# EAGLE board Tubes Kelompok 8 (EAGLE 9.7.0)

Size 181.02 x 149.39 mm. Coordinates in mm from the lower left corner, seen from the top.
Outline: 0,0 181.02,0 181.02,149.39 0,149.39 0,0
Copper layers (1*16): Top 0.035mm / dielectric 1.5mm / Bottom 0.035mm
Design rules "default": minimum track width 6mil, minimum drill 0.35mm, track to track 6mil, track to pad 6mil, pad to pad 6mil, via to via 6mil, smd to smd 6mil, copper to edge 40mil, drill to drill 6mil, minimum pad ring 10mil, minimum via ring 8mil, stop-mask expansion 4mil, vias tented up to drill 0mil, thermal gap 10mil

## Footprints (pad centres in the part's own frame; a part is rotated, then mirrored left to right if it is on the bottom)
LED-RGB-5MM = drill 0.9: B 0.635,0.635; C -0.635,-0.635; G 1.905,-0.635; R -1.905,0.635
MQ-XX-SOCKET = drill 1.27: 1 -6.223,6.223; 2 -8.788,0; 3 -6.223,-6.223; 4 6.223,-6.223; 5 8.788,0; 6 6.223,6.223
MOTOR = drill 1.118 pad 3.15 octagon: + 2.54,0; - -2.54,0
PIEZO = drill 1 pad 1.6: 1 -3.5,0; 2 3.5,0
RESAD1016W63L850D250B = drill 0.83 pad 1.43: 1 -5.08,0; 2 5.08,0
SWITCH-MOMENTARY-PTH-6.5MM = drill 1.016 pad 1.88: 1 -3.251,2.261; 2 3.251,2.261; 3 -3.251,-2.261; 4 3.251,-2.261
ARDUINO-UNO-R3-SHIELD = drill 1.016 pad 1.88: 3.3V 24.13,-2.54; 5V 24.13,0; A0 24.13,12.7; A1 24.13,15.24; A2 24.13,17.78; A3 24.13,20.32; A4 24.13,22.86; A5 24.13,25.4; AREF -24.13,-13.97; D2 -24.13,20.32; D3 -24.13,17.78; D4 -24.13,15.24; D5 -24.13,12.7; D6 -24.13,10.16; D7 -24.13,7.62; D8 -24.13,3.81; D9 -24.13,1.27; D10 -24.13,-1.27; D11 -24.13,-3.81; D12 -24.13,-6.35; D13 -24.13,-8.89; GND@0 24.13,2.54; GND@1 24.13,5.08; GND@2 -24.13,-11.43; IOREF 24.13,-7.62; NC 24.13,-10.16; RES 24.13,-5.08; RX -24.13,25.4; SCL -24.13,-19.05; SDA -24.13,-16.51; TX -24.13,22.86; VIN 24.13,7.62
JHD-162A = drill 1.016 long: 1 -19.05,0; 2 -16.51,0; 3 -13.97,0; 4 -11.43,0; 5 -8.89,0; 6 -6.35,0; 7 -3.81,0; 8 -1.27,0; 9 1.27,0; 10 3.81,0; 11 6.35,0; 12 8.89,0; 13 11.43,0; 14 13.97,0; 15 16.51,0; 16 19.05,0
TO92 = drill 0.813 octagon: 1 -1.27,0; 2 0,1.905; 3 1.27,0

## Placement (x,y rotation side)
D2  LED-RGBRCBG-PTH  [LED-RGB-5MM]  39.67,141.9 0 top
GAS1  GAS-SENSORMQ-XX-SOCKET  [MQ-XX-SOCKET]  57.84,25.48 270 top
M1  MOTOR_HDR  [MOTOR]  122.14,25.36 270 top
PIEZO2  PIEZO  [PIEZO]  11.73,129.2 0 top
R1  1k  [RESAD1016W63L850D250B]  88.32,52.15 90 top
R2  4k  [RESAD1016W63L850D250B]  52.76,44.53 90 top
R3  330  [RESAD1016W63L850D250B]  43.48,134.28 90 top
R4  330  [RESAD1016W63L850D250B]  40.95,134.28 90 top
R5  330  [RESAD1016W63L850D250B]  35.87,134.28 90 top
R7  2.2k  [RESAD1016W63L850D250B]  33.33,121.58 0 top
R9  1k  [RESAD1016W63L850D250B]  93.4,8.97 90 top
S1  SWITCH_MOMENTARY  [SWITCH-MOMENTARY-PTH-6.5MM]  95.94,25.48 90 top
U1  ARDUINO-UNO-R3-SHIELD  [ARDUINO-UNO-R3-SHIELD]  49.85,81.59 270 top
U2  LCD-16X2JHD-162A  [JHD-162A]  125.39,89.15 0 top
U4  TMP36GT9Z_TO92  [TO92]  83.24,14.05 0 top

## Library data of the parts
D2 GAS1 M1 PIEZO2 R1-R5 R7 R9 S1 U1 U2 U4 = Tinkercad

## Nets
D2_B: D2.B R4.2
D2_G: D2.G R3.2
D2_R: D2.R R5.2
PIEZO2_1: PIEZO2.1 R7.1
U1_5V: GAS1.4 GAS1.5 GAS1.6 R1.1 S1.3 S1.4 U1.5V U2.2 U4.3
U1_A0: GAS1.1 GAS1.3 R2.1 U1.A0
U1_A1: U1.A1 U4.2
U1_A2: M1.+ U1.A2
U1_D2: U1.D2 U2.14
U1_D3: U1.D3 U2.13
U1_D4: U1.D4 U2.12
U1_D5: U1.D5 U2.11
U1_D6: U1.D6 U2.6
U1_D7: U1.D7 U2.4
U1_D8: R3.1 U1.D8
U1_D9: R4.1 U1.D9
U1_D10: R5.1 U1.D10
U1_D11: PIEZO2.2 U1.D11
U1_D12: R9.2 S1.1 S1.2 U1.D12
U1_GND: D2.C GAS1.2 M1.- R2.2 R7.2 R9.1 U1.GND@0 U1.GND@1 U1.GND@2 U2.1 U2.3 U2.5 U2.16 U4.1
U2_LED+: R1.2 U2.15

## Tracks (layer width: path | path; a pad name or v marks a point on that pad's centre or on a via)
D2_B  (1 unrouted)
D2_G  (1 unrouted)
D2_R  (1 unrouted)
PIEZO2_1  (1 unrouted)
U1_5V  (8 unrouted)
U1_A0  (3 unrouted)
U1_A1  (1 unrouted)
U1_A2  (1 unrouted)
U1_D2  (1 unrouted)
U1_D3  (1 unrouted)
U1_D4  (1 unrouted)
U1_D5  (1 unrouted)
U1_D6  (1 unrouted)
U1_D7  (1 unrouted)
U1_D8  (1 unrouted)
U1_D9  (1 unrouted)
U1_D10  (1 unrouted)
U1_D11  (1 unrouted)
U1_D12  (3 unrouted)
U1_GND  (13 unrouted)
U2_LED+  (1 unrouted)